# Altium PCB PA_v2_old.PcbDoc (part 2 of 2)
Units mm, origin at the board's own origin, x right, y up, seen from the top; angles counter-clockwise.
Board outline 179 x 79 mm, 2 copper layers (Top Layer, Bottom Layer), stack 1.571 mm thick; 152 components, 92 nets, 512 pads, 151 vias.
Unrouted connection lines stored in the file: 225.
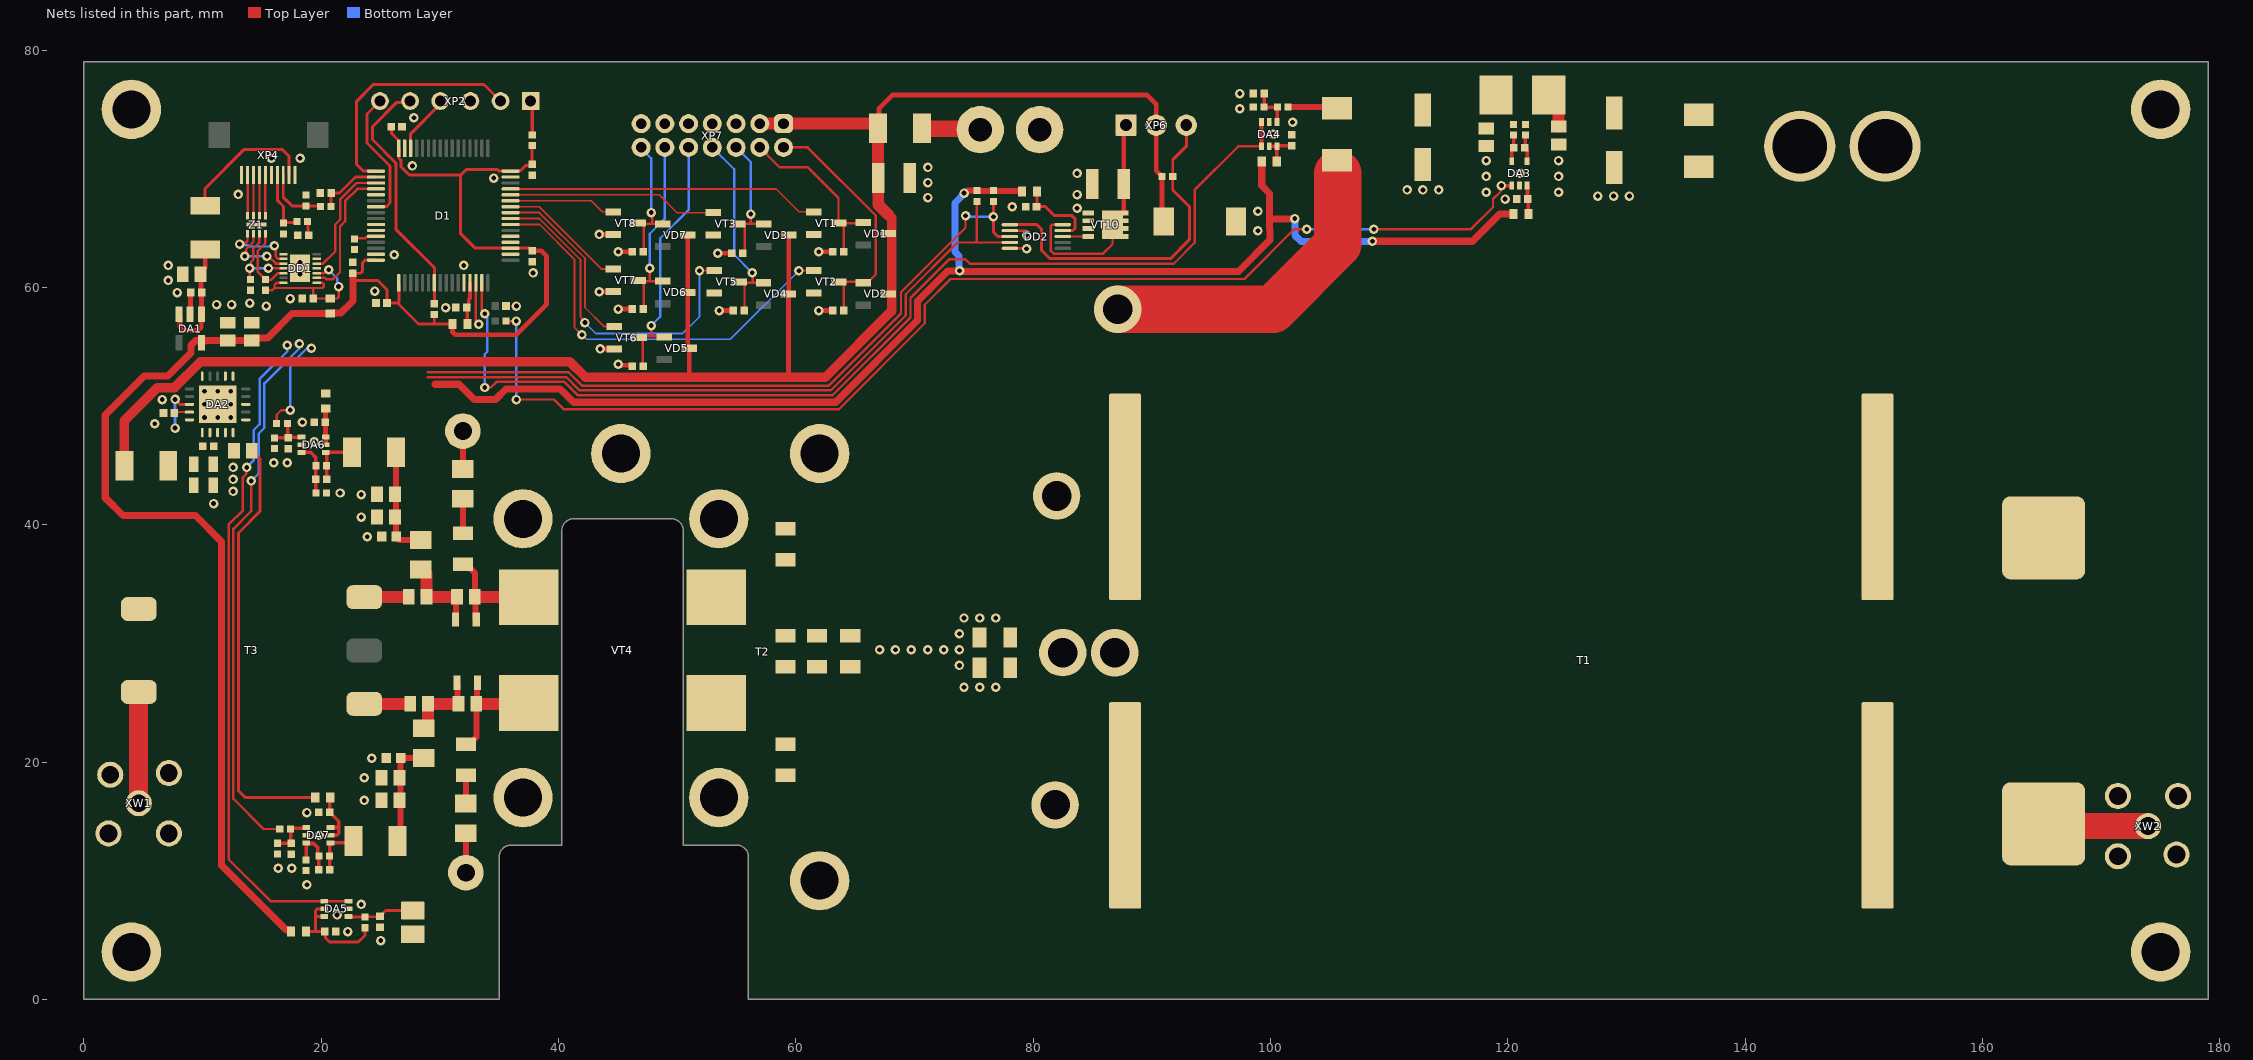
[diagram p2: the nets of this part, all layers, seen from the top]

## Via types
v1: diameter 0.8, hole 0.4, Top Layer to Bottom Layer, tented both sides, 138 vias
v2: diameter 0.8, hole 0.4, Top Layer to Bottom Layer, 11 vias
v3: diameter 4, hole 2.5, Top Layer to Bottom Layer, 2 vias

## Nets (pads, with @x,y where several pads share a name; then routed paths per layer and width w, separated by ;. In a path a pad name is that pad's centre, name@x,y a point inside that pad or via, vN(x,y) a via of type N, cw(c..) or ccw(c..) an arc to the next point about the centre after c; other vN are vias at no path point) (continued)
ADC_TEMP: D1.14 DA5.3 DA5.4 | length 60.5
  Top Layer w0.2: v1(13.716,44.831) 13.688,44.803 13.688,44.269 13.397,43.978 13.397,41.21 12.194,40.007 12.194,11.814 15.73,8.278 DA5.4@20.243,8.278 DA5.3@22.293,8.278 ; D1.14@33.035,60.378 33.035,57.135 v1(33.274,56.896)
  Bottom Layer w0.2: v1(13.716,44.831) 14.301,45.416 14.301,47.956 14.808,48.463 14.808,52.273 17.145,54.61 v1(17.145,55.118)
ADC_VOLT: D1.15 DA4.3 DA4.4 | length 89.8
  Top Layer w0.2: D1.15@33.535,60.378 33.535,58.032 v1(33.782,57.785) ; v1(33.782,51.562) 34.29,51.562 34.76,52.032 40.493,52.032 41.604,50.921 63.108,50.921 69.658,57.472 69.658,59.117 72.898,62.357 74.295,62.357 74.656,61.996 91.841,61.996 93.599,63.754 93.599,68.199 97.281,71.881 DA4.4@99.231,71.881
  Top Layer w0.3: DA4.4@99.231,71.881 DA4.3@99.231,73.931
  Bottom Layer w0.2: v1(33.782,51.562) 33.782,54.359 33.974,54.551 33.974,57.431 33.782,57.623 v1(33.782,57.785)
BAND0_EN: D1.27 VT8.1 | length 9
  Top Layer w0.15: D1.27@35.955,67.298 42.751,67.298 43.686,66.363 VT8.1@44.602,66.363
BAND1_EN: D1.26 VT7.1 | length 10.8
  Top Layer w0.15: D1.26@35.955,66.798 38.386,66.798 43.647,61.537 VT7.1@44.602,61.537
BAND2_EN: D1.25 VT6.1 | length 15.2
  Top Layer w0.15: D1.25@35.955,66.302 38.387,66.302 42.223,62.466 42.223,58.301 43.813,56.711 VT6.1@44.695,56.711
BAND3_EN: D1.24 VT5.1 | length 28.5
  Top Layer w0.15: D1.24@35.955,65.798 38.396,65.798 41.842,62.352 41.842,57.534 42.223,57.153 v1(42.223,57.031) ; v1(51.875,61.41) VT5.1@53.111,61.41
  Bottom Layer w0.15: v1(42.223,57.031) 43.152,56.102 50.438,56.102 51.875,57.539 v1(51.875,61.41)
BAND4_EN: D1.28 VT3.1 | length 17.7
  Top Layer w0.15: D1.28@35.955,67.798 48.474,67.798 49.975,66.297 VT3.1@53.018,66.297
BAND5_EN: D1.29 VT1.1 | length 26.3
  Top Layer w0.15: D1.29@35.955,68.298 58.322,68.298 60.257,66.363 VT1.1@61.493,66.363
BAND6_EN: D1.23 VT2.1 | length 35.3
  Top Layer w0.15: D1.23@35.955,65.298 38.401,65.298 41.334,62.365 41.334,56.65 v1(41.969,56.015) ; v1(60.257,61.41) VT2.1@61.493,61.41
  Bottom Layer w0.15: v1(41.969,56.015) 42.35,55.634 54.481,55.634 v1(60.257,61.41)
CON_RS422A: XP4.9 Z1.4 | length 3.4
  Top Layer w0.2: Z1.4@13.787,66.051 13.793,66.057 13.793,69.471 XP4.9@13.799,69.477
CON_RS422B: XP4.8 Z1.3 | length 3.4
  Top Layer w0.2: Z1.3@14.287,66.051 14.293,66.057 14.293,69.471 XP4.8@14.299,69.477
CON_RS422Y: XP4.6 Z1.1 | length 3.4
  Top Layer w0.2: Z1.1@15.287,66.051 15.293,66.057 15.293,69.471 XP4.6@15.299,69.477
CON_RS422Z: XP4.7 Z1.2 | length 3.4
  Top Layer w0.2: Z1.2@14.787,66.051 14.793,66.057 14.793,69.471 XP4.7@14.799,69.477
CON_TX_FAIL: R4.1 R5.1 XP4.3 | length 5.3
  Top Layer w0.25: XP4.3@16.799,69.477 16.799,67.596 17.527,66.868 R5.1@18.728,66.868 18.757,66.839 19.9,66.839 R4.1@19.929,66.81
CON_TXON: R10.1 R11.1 XP4.4 | length 5.5
  Top Layer w0.25: XP4.4@16.299,69.477 16.299,67.334 16.823,66.81 R11.1@16.823,65.413 16.887,65.476 17.892,65.476 R10.1@17.955,65.54
DAC_BIAS1: D1.20 R24.1 | length 8.2
  Top Layer w0.2: R24.1@16.246,48.522 16.246,49.266 16.637,49.657 v1(17.399,49.657)
  Bottom Layer w0.2: v1(17.399,49.657) 17.399,53.467 18.796,54.864 v1(19.177,54.864)
DAC_BIAS2: D1.21 R32.1 | length 45.6
  Top Layer w0.2: v1(14.097,43.688) 14.097,41.148 12.594,39.645 12.594,16.904 15.139,14.359 R32.1@16.5,14.359
  Bottom Layer w0.2: v1(14.097,43.688) 14.732,44.323 14.732,47.688 15.208,48.164 15.208,51.911 18.161,54.864 v1(18.161,55.245)
GND: C1.1 C2.1 C3.1 C4.1 C5.1 C6.1 C7.1 C8.1 C9.1 C10.1 C11.1 C12.1 C13.1 C14.1 C15.1 C16.1 C17.1 C18.1 C19.1 C21.2 C22.2 C23.1 C24.1 C26.1 C28.1 C30.1 C32.1 C33.1 C35.1 C37.1 C38.1 C39.1 C40.1 C41.1 C42.1 C43.1 C46.2 C47.2 C48.2 C49.2 C50.1 C54.1 C55.1 C56.1 C141.1 C142.1 C143.1 C144.1 C145.1 C155.1 C156.1 C165.1 C166.1 D1.12 D1.18 D1.31 D1.47 D1.63 DA1.2 DA2.6 DA2.7 DA2.10 DA2.17 DA2.18 DA2.19 DA2.21 DA3.2 DA4.2 DA5.2 DA6.2 DA7.2 DD1.4 DD1.6 DD1.8 DD1.15 DD2.2 DD2.5 F1.2 pad.1 R5.2 R11.2 R12.1 R14.2 R25.2 R28.1 R30.1 R33.2 R34.1 T1.2@151.139,42.345 T1.5 T3.5 VT1.2 VT2.2 VT3.2 VT5.2 VT6.2 VT7.2 VT8.2 VT10.S XP1.2 XP2.3 XP4.1 XP4.5 XP4.10 XP5.2 XP7.5 XP7.7 XP7.9 XP7.11 XP7.13 XW1.2 XW2.2 Z1.9 | length 16.4
  Top Layer w0.2: DD2.5@78.032,63.286 v1@79.275,63.286 ; DD2.2@78.032,64.786 79.299,64.786 v1@79.434,64.651
  Top Layer w0.4: DA1.2@8.949,57.723 8.973,57.747 8.973,59.547 C4.1@8.997,59.571 ; v1(43.427,59.637) VT7.2@44.602,59.637 ; v1(43.427,64.463) VT8.2@44.602,64.463 ; v1(43.52,54.811) VT6.2@44.695,54.811 ; v1(45.033,53.522) 45.11,53.446 46.11,53.446 C54.1@46.208,53.348 ; v1(45.033,58.174) C55.1@46.208,58.174 ; v1(45.033,63) C56.1@46.208,63 ; v1(53.415,62.873) C33.1@54.59,62.873 ; v1(53.542,58.047) C50.1@54.717,58.047 ; v1(61.924,58.047) C32.1@63.099,58.047 ; v1(61.924,63) C5.1@63.099,63
  other v1: 25.019,4.953 22.225,5.715 21.336,7.112 23.368,8.001 18.796,9.652 16.383,11.049 17.526,11.049 19.812,13.843 18.796,15.748 23.622,16.764 23.622,18.669 24.257,20.32 74.164,26.297 75.497,26.297 76.831,26.297 73.783,28.138 67.052,29.472 68.385,29.472 69.719,29.472 71.116,29.472 72.449,29.472 73.783,29.472 73.783,30.805 74.164,32.139 75.497,32.139 76.831,32.139 23.876,38.989 23.368,40.64 10.922,41.783 23.368,42.545 21.59,42.672 12.573,42.799 12.573,43.815 12.573,44.831 16.002,45.212 17.145,45.212 19.431,46.99 5.969,48.514 18.415,48.641 6.604,50.546 30.48,58.293 15.367,58.42 36.449,58.42 11.176,58.547 12.446,58.547 13.97,58.674 17.399,59.055 7.874,59.563 24.511,59.69 7.112,60.579 37.846,61.214 7.112,61.849 32.004,61.849 26.162,62.738 79.434,63.254 79.434,64.397 98.933,64.77 98.933,66.421 83.693,66.675 78.232,66.802 119.761,67.437 71.12,67.564 127.567,67.699 128.901,67.699 130.234,67.699 13.013,67.826 83.693,67.818 118.169,68.016 124.265,68.016 111.502,68.207 112.835,68.207 114.169,68.207 71.12,68.834 34.544,69.215 118.169,69.35 124.265,69.35 83.693,69.596 121.031,69.596 71.12,70.104 27.686,70.231 118.169,70.683 124.265,70.683 15.807,70.874 18.22,70.874 100.203,72.898 101.854,73.914 27.813,74.295 97.409,75.057 97.409,76.327
  other v2: 10.173,49.043 11.273,49.043 12.373,49.043 10.173,50.143 11.273,50.143 12.373,50.143 10.173,51.243 11.273,51.243 12.373,51.243 18.22,61.095 18.22,62.111
I2C_SCL: D1.58 DD2.4 R6.1 | length 59.2
  Top Layer w0.2: 28.956,52.432 40.659,52.432 41.77,51.321 62.942,51.321 69.258,57.637 69.258,59.422 73.615,63.779 75.243,63.779 ; R6.1@75.243,67.249 75.243,63.779 ; DD2.4@78.025,63.779 75.243,63.779
I2C_SDA: D1.59 DD2.3 R7.1 | length 59.6
  Top Layer w0.2: 28.956,52.832 40.86,52.832 41.971,51.721 62.776,51.721 68.858,57.803 68.858,59.587 74.295,65.024 v1(74.295,66.04)
  Top Layer w0.25: R7.1@76.64,67.249 v1(76.64,65.95) 76.64,64.651 77.005,64.286 DD2.3@78.032,64.286
  Bottom Layer w0.2: v1@74.586,65.95 v1(76.64,65.95)
IN_5V: L1.1 XP4.2 | length 11.7
  Top Layer w0.25: L1.1@10.219,66.882 10.219,68.334 13.521,71.636 16.696,71.636 17.299,71.033 XP4.2@17.299,69.477
NetC1_2: C1.2 C4.2 DA1.1 DA1.3 L1.2 | length 9.7
  Top Layer w0.4: DA1.3@7.999,57.723 8.099,57.623 8.099,56.63 8.334,56.396 9.665,56.396 9.899,56.63 DA1.1@9.899,57.723 9.908,57.732 9.908,59.562 C4.2@9.917,59.571 9.872,59.616 9.872,61.049 C1.2@9.826,61.095 ; C1.2@9.826,61.245 10.219,61.638 L1.2@10.219,63.182
NetC9_2: C9.2 C10.2 C11.2 DA2.13 DA2.15 DA2.16 L35.2 | length 3.8
  Top Layer w0.25: v1(7.679,50.554) 8.09,50.143 DA2.13@8.898,50.143
  Bottom Layer w0.25: v1(7.679,48.141) v1(7.679,50.554)
NetC12_2: C12.2 DD1.1 DD1.3 DD1.14 L3.2 R9.2 | length 13.9
  Top Layer w0.2: R9.2@15.299,59.756 15.865,59.756 16.061,59.952 ; DD1.14@16.825,60.403 16.258,60.403 16.061,60.206 16.061,59.952 ; DD1.1@19.615,60.403 20.055,60.403 20.223,60.235 20.223,60.069 20.106,59.952 19.363,59.952 ; DD1.3@19.615,61.203 20.216,61.203 20.489,61.476 v1(20.633,61.476) ; v1(21.463,60.071) 21.463,59.175 21.346,59.058 L3.2@20.76,59.058 20.755,59.063 C12.2@19.315,59.063 19.315,59.904 19.363,59.952 ; 16.061,59.952 19.363,59.952
  Bottom Layer w0.2: v1(20.633,61.476) 21.348,60.761 21.348,60.186 v1(21.463,60.071)
NetC13_2: C13.2 D1.53 R10.2 | length 1.2
  Top Layer w0.25: R10.2@18.855,65.54 18.895,65.5 18.895,64.436 C13.2@18.934,64.397
NetC14_2: C14.2 D1.13 L4.1 | length 3.6
  Top Layer w0.3: L4.1@32.312,56.904 32.291,56.925 32.291,58.279 C14.2@32.269,58.301 32.439,58.471 32.439,58.982 32.535,59.078 D1.13@32.535,60.378
NetC21_1: C21.1 C23.2 L5.2 R15.1 R16.1 | length 1.9
  Top Layer w1: C23.2@124.265,73.541 R15.1@124.265,75.446
NetC22_1: C22.1 C24.2 L6.1 R15.2 R17.1 R27.2 | length 4.2
  Top Layer w0.5: R27.2@101.474,75.192 105.51,75.192 L6.1@105.596,75.106
NetC25_1: C25.1 DA3.5 R17.2 | length 2.3
  Top Layer w0.3: DA3.5@120.313,70.629 120.313,71.573 120.479,71.739 120.479,72.813 R17.2@120.455,72.837
NetC25_2: C25.2 DA3.4 R16.2 | length 2.3
  Top Layer w0.3: R16.2@121.471,72.837 121.447,72.813 121.447,71.787 C25.2@121.423,71.763 121.613,71.573 DA3.4@121.613,70.629
NetC27_1: C27.1 R19.1 | length 2.9
  Top Layer w0.5: C27.1@31.936,39.281 R19.1@31.936,42.192
NetC27_2: C27.2 C29.1 R20.2 VT4.3 | length 9.8
  Top Layer w0.5: C27.2@31.936,36.681 32.211,36.681 32.94,35.952 C29.1@32.94,33.917 33.015,33.842 33.015,32.062 R20.2@33.065,32.012
  Top Layer w1: C29.1@32.94,33.917 37.442,33.917 VT4.3@37.475,33.884
NetC28_2: C28.2 DA3.3 L7.2 | length 2.4
  Top Layer w0.3: DA3.3@121.613,68.579 121.645,68.547 121.645,67.477 C28.2@121.677,67.445 121.699,67.423 121.699,66.196 L7.2@121.72,66.175
NetC29_2: C29.2 C36.1 R20.1 R22.1 | length 7.1
  Top Layer w0.5: R20.1@31.315,32.012 31.365,32.062 31.365,33.842 C29.2@31.44,33.917
  Top Layer w1: R22.1@28.38,36.223 28.53,36.223 28.876,35.877 C36.1@28.876,33.917 C29.2@31.44,33.917
NetC30_2: C30.2 C31.2 C52.2 C53.2 T1.1 T2.1 VT4.1
NetC31_1: C31.1 C35.2 C52.1 C53.1 T1.3 T2.3 VT4.2
NetC34_1: C34.1 C45.2 R21.2 VT4.4 | length 10.2
  Top Layer w0.5: C45.2@32.19,21.501 32.465,21.501 33.067,22.103 C34.1@33.067,24.9 33.128,24.961 33.128,26.628 R21.2@33.178,26.678
  Top Layer w1: C34.1@33.067,24.9 37.391,24.9 VT4.4@37.475,24.984
NetC34_2: C34.2 C44.1 R21.1 R23.1 | length 6.7
  Top Layer w0.5: R21.1@31.428,26.678 31.478,26.628 31.478,24.989 C34.2@31.567,24.9
  Top Layer w1: R23.1@28.634,22.848 28.753,22.848 29.003,23.098 C44.1@29.003,24.9 C34.2@31.567,24.9
NetC36_2: C36.2 T3.1 | length 3.8
  Top Layer w1: T3.1@23.631,33.901 27.376,33.901 C36.2@27.376,33.917
NetC37_2: C37.2 C38.2 C43.2 L8.2 R22.2 | length 9.3
  Top Layer w0.5: L8.2@26.293,46.109 26.313,46.089 C43.2@26.313,38.997 ; C43.2@26.313,38.972 26.562,38.723 R22.2@28.38,38.723
NetC39_2: C39.2 C40.2 C142.2 L34.2 R23.2 | length 9
  Top Layer w0.5: L34.2@26.42,13.343 26.694,13.617 C142.2@26.694,20.328 28.614,20.328 R23.2@28.634,20.348
NetC41_2: C41.2 C42.2 L6.2 T2.2 | length 26.8
  Top Layer w4: v3(87.122,58.166) 100.203,58.166 105.664,63.627 105.664,69.596
  other v3: 86.868,29.21
NetC44_2: C44.2 T3.3 | length 3.9
  Top Layer w1: T3.3@23.631,24.901 C44.2@27.503,24.9
NetC45_1: C45.1 R26.1 | length 2.4
  Top Layer w0.5: R26.1@32.19,16.498 C45.1@32.19,18.901
NetC46_1: C46.1 DA4.5 DA4.6 L9.2 | length 3.2
  Top Layer w0.3: DA4.5@99.881,71.881 DA4.6@100.531,71.881 ; L9.2@100.511,70.62 100.521,70.63 100.521,71.871 DA4.6@100.531,71.881 ; C46.1@101.786,71.938 100.581,71.938 100.531,71.888 DA4.6@100.531,71.881
NetC47_1: C47.1 DA4.1 R27.1 R28.2 | length 3.6
  Top Layer w0.3: C47.1@99.452,76.335 99.447,76.33 99.447,75.197 R28.2@99.442,75.192 R27.1@100.574,75.192 100.553,75.17 100.553,73.952 DA4.1@100.531,73.931
NetC48_1: C48.1 DA5.5 DA5.6 L10.2 R29.1 | length 9.8
  Top Layer w0.25: L10.2@18.723,5.723 19.512,5.723 ; DA5.6@20.243,6.978 19.519,6.978 19.512,6.985 ; DA5.5@20.243,7.628 19.658,7.628 19.512,7.481 19.512,6.985 ; R29.1@23.681,6.035 23.681,5.393 23.114,4.826 20.701,4.826 20.353,5.174 20.353,5.67 C48.1@20.3,5.723 19.512,5.723 ; 19.512,5.723 19.512,6.985
NetC49_1: C49.1 DA5.1 F1.1 R29.2 | length 5.7
  Top Layer w0.25: DA5.1@22.293,6.978 22.315,6.956 23.66,6.956 R29.2@23.681,6.935 23.71,6.964 24.922,6.964 C49.1@24.951,6.993 25.443,7.485 F1.1@27.714,7.485
NetC141_2: C141.2 DA6.5 DA6.6 L32.2 | length 3.1
  Top Layer w0.4: L32.2@20.379,49.797 20.355,49.773 20.355,48.673 C141.2@20.331,48.649 20.36,48.62 20.36,47.394 DA6.6@20.388,47.394 DA6.5@20.388,46.744
NetC143_2: C143.2 DA6.1 R24.2 R25.1 | length 3.5
  Top Layer w0.3: R25.1@16.061,47.321 16.066,47.326 17.199,47.326 C143.2@17.204,47.331 ; R24.2@17.146,48.522 17.175,48.493 17.175,47.36 C143.2@17.204,47.331 ; DA6.1@18.338,47.394 18.307,47.362 17.236,47.362 C143.2@17.204,47.331
NetC144_2: C144.2 DA7.5 DA7.6 L33.2 | length 4.8
  Top Layer w0.3: L33.2@20.755,17.026 20.734,17.004 20.734,15.777 C144.2@20.712,15.756 21.463,15.005 21.463,14.508 ; DA7.5@20.778,13.836 21.287,13.836 21.463,14.012 21.463,14.508 ; DA7.6@20.778,14.486 21.441,14.486 21.463,14.508
NetC145_2: C145.2 DA7.1 R32.2 R33.1 | length 3.7
  Top Layer w0.3: R33.1@16.315,13.158 16.32,13.163 17.453,13.163 C145.2@17.458,13.168 17.429,13.197 17.429,14.33 R32.2@17.4,14.359 17.477,14.436 18.678,14.436 DA7.1@18.728,14.486
NetC146_1: C146.1 DA6.4 L8.1 R31.2 | length 4.5
  Top Layer w0.3: C146.1@20.458,43.823 20.453,43.828 20.453,44.961 R31.2@20.448,44.966 20.448,46.044 20.398,46.094 DA6.4@20.388,46.094 22.578,46.094 L8.1@22.593,46.109
NetC146_2: C146.2 DA6.3 R30.2 R31.1 | length 4.4
  Top Layer w0.3: DA6.3@18.338,46.094 19.124,46.094 19.548,45.67 R31.1@19.548,44.966 19.543,44.961 19.543,43.828 C146.2@19.538,43.823 19.543,43.818 19.543,42.685 R30.2@19.548,42.68
NetC147_1: C147.1 DA7.4 L34.1 R35.2 | length 4.3
  Top Layer w0.3: C147.1@20.712,10.93 20.707,10.935 20.707,12.068 R35.2@20.702,12.073 20.702,13.136 20.752,13.186 DA7.4@20.778,13.186 22.563,13.186 L34.1@22.72,13.343
NetC147_2: C147.2 DA7.3 R34.2 R35.1 | length 4.5
  Top Layer w0.3: R34.2@18.728,11.761 DA7.3@18.728,13.186 18.778,13.136 19.376,13.136 19.689,12.823 19.689,12.186 R35.1@19.802,12.073 19.797,12.068 19.797,10.935 C147.2@19.792,10.93
NetC156_2: C156.2 DA2.14 | length 1.3
  Top Layer w0.2: C156.2@7.631,49.411 7.713,49.493 DA2.14@8.898,49.493
NetC165_2: C165.2 DD2.9 L36.2 | length 6.9
  Top Layer w0.25: L36.2@80.318,68.08 80.297,68.058 80.297,66.831 C165.2@80.275,66.81 81.018,66.81 81.788,66.04 83.252,66.04 83.507,65.785 83.507,64.947 83.352,64.792 82.488,64.792 DD2.9@82.482,64.786
NetC166_2: C166.2 DD2.10 VT10.D XP6.1 | length 18
  Top Layer w0.2: DD2.10@82.482,65.286 81.593,65.286 81.466,65.159 81.466,63.12 81.74,62.846 85.884,62.846 86.673,63.635 VT10.D@86.673,65.286
  Top Layer w0.4: VT10.D@87.533,66.276 87.617,66.276 C166.2@87.617,68.715 87.617,73.469 XP6.1@87.816,73.668
NetD1_7: D1.7 R13.1 XP2.5 | length 21.2
  Top Layer w0.25: XP2.5@27.491,75.7 27.386,75.595 26.366,75.595 24.314,73.542 24.314,72.46 26.289,70.485 26.289,64.897 29.535,61.651 D1.7@29.535,60.378 29.529,60.372 29.529,58.63 R13.1@29.523,58.624
NetD1_60: D1.60 R14.1 | length 1.9
  Top Layer w0.2: R14.1@22.792,64.085 22.836,64.129 23.678,64.129 23.807,64.258 24.575,64.258 D1.60@24.615,64.298
NetDA3_1: DA3.1 R18.2 | length 101.1
  Top Layer w0.2: R18.2@35.561,57.158 v1(36.441,57.158) ; v1(36.449,50.546) 39.624,50.546 40.449,49.721 63.605,49.721 70.858,56.975 70.858,58.539 73.025,60.706 97.79,60.706 101.989,64.905 v1(103.056,64.905) ; v1@108.712,64.905 116.899,64.905 118.745,66.751 118.745,67.437 119.373,68.065 119.373,68.503 v1(119.448,68.579)
  Top Layer w0.3: v1(119.448,68.579) DA3.1@120.313,68.579
  Bottom Layer w0.2: v1(36.441,57.158) 36.445,57.154 36.445,50.55 v1(36.449,50.546) ; v1(103.056,64.905) v1@108.712,64.905
  other v1: 108.712,64.897
NetDD2_1: DD2.1 R36.1 XP6.3 | length 28.7
  Top Layer w0.25: DD2.1@78.032,65.286 80.323,65.286 80.704,64.905 80.704,63.127 81.41,62.421 91.555,62.421 93.15,64.016 93.15,66.81 91.753,68.207 R36.1@91.753,69.35 91.753,70.747 92.896,71.89 XP6.3@92.896,73.668
NetDD2_8: DD2.8 VT10.G | length 2.2
  Top Layer w0.2: DD2.8@82.482,64.286 82.487,64.291 84.628,64.291 VT10.G@84.633,64.296
NetL2_1: L2.1 XP5.1 | length 5
  Top Layer w1: L2.1@70.616,73.414 L2.1@70.68,73.35 ; XP5.1@75.474,73.35 XP5.1@75.537,73.287
  Top Layer w1.4: L2.1@70.68,73.35 XP5.1@75.474,73.35
NetR8_2: R8.2 XP2.1 | length 2.9
  Top Layer w0.3: XP2.1@37.651,75.7 37.778,75.573 R8.2@37.778,72.848
NetR19_2: R19.2 T2.4 | length 3.2
  Top Layer w0.5: R19.2@31.936,44.692 T2.4@31.936,47.887
NetR26_2: R26.2 T2.5 | length 3.3
  Top Layer w0.5: T2.5@32.19,10.676 R26.2@32.19,13.998
NetT1_4: T1.2@151.139,16.345 T1.4 XW2.1 | length 8.9
  Top Layer w2.2: T1.4@165.139,14.795 165.334,14.6 XW2.1@173.935,14.6
NetT3_4: T3.4 XW1.1 | length 9.4
  Top Layer w1.6: XW1.1@4.618,16.531 T3.4@4.618,25.901
  Top Layer w2: T3.4@4.618,25.901 T3.4@4.631,25.901
RELAY_0: C56.2 VD7.1 VT8.3 XP7.14 | length 10.9
  Top Layer w0.2: VT8.3@46.989,65.347 47.891,65.347 ; C56.2@47.189,62.934 VT8.3@47.189,65.147 ; v1(47.811,66.302) 47.891,66.222 47.891,65.347 ; VD7.1@48.793,65.347 47.891,65.347
  Bottom Layer w0.2: XP7.14@46.955,71.795 46.955,71.722 47.811,70.866 v1(47.811,66.302)
RELAY_1: C55.2 VD6.1 VT7.3 XP7.12 | length 15.8
  Top Layer w0.2: VT7.3@46.989,60.521 47.684,60.521 ; C55.2@47.189,58.108 VT7.3@47.189,60.321 ; v1(47.684,61.603) 47.684,60.521 ; VD6.1@48.793,60.521 47.684,60.521
  Bottom Layer w0.2: v1(47.684,61.603) 47.684,64.524 48.955,65.795 XP7.12@48.955,71.795
RELAY_2: C54.2 VD5.1 VT6.3 XP7.10 | length 21.2
  Top Layer w0.2: VT6.3@46.896,55.888 47.798,55.888 ; C54.2@47.096,53.475 VT6.3@47.096,55.688 ; v1(47.811,56.777) 47.798,56.764 47.798,55.888 ; VD5.1@48.7,55.888 47.798,55.888
  Bottom Layer w0.2: v1(47.811,56.777) 48.573,57.539 48.573,64.143 50.955,66.525 XP7.10@50.955,71.795
RELAY_3: C50.2 VD4.1 VT5.3 XP7.8 | length 16.8
  Top Layer w0.2: VT5.3@55.464,60.394 56.366,60.394 ; C50.2@55.664,57.981 VT5.3@55.664,60.194 ; v1(56.32,61.222) 56.366,61.176 56.366,60.394 ; VD4.1@57.268,60.394 56.366,60.394
  Bottom Layer w0.2: XP7.8@52.955,71.795 54.796,69.954 54.796,62.746 v1(56.32,61.222)
RELAY_4: C33.2 VD3.1 VT3.3 XP7.6 | length 11
  Top Layer w0.2: VT3.3@55.498,65.347 56.193,65.347 ; C33.2@55.698,62.934 VT3.3@55.698,65.147 ; v1(56.193,66.175) 56.193,65.347 ; VD3.1@57.302,65.347 56.193,65.347
  Bottom Layer w0.2: XP7.6@54.955,71.795 56.193,70.557 v1(56.193,66.175)
RELAY_5: C5.2 VD1.1 VT1.3 XP7.4 | length 14.9
  Top Layer w0.2: XP7.4@56.955,71.795 58.638,70.112 61.019,70.112 63.593,67.538 VT1.3@63.593,65.413 ; C5.2@64.019,63 64.019,65.213 63.819,65.413 65.623,65.413 VD1.1@65.684,65.474
RELAY_6: C32.2 VD2.1 VT2.3 XP7.2 | length 21.1
  Top Layer w0.2: XP7.2@58.955,71.795 60.987,71.795 66.734,66.048 66.734,61.094 66.034,60.394 VD2.1@65.684,60.394 65.618,60.46 VT2.3@63.819,60.46 ; VT2.3@63.593,60.46 VT2.3@63.819,60.46 ; C32.2@64.019,58.047 64.019,60.26 VT2.3@63.819,60.46
RS422_RX: D1.52 DD1.2 | length 11.4
  Top Layer w0.2: DD1.2@19.615,60.803 20.316,60.803 20.424,60.695 20.995,60.695 21.576,61.276 21.576,65.137 22.014,65.575 22.014,67.267 23.045,68.298 D1.52@24.615,68.298
RS422_TX: D1.51 DD1.5 | length 10.1
  Top Layer w0.2: DD1.5@19.615,62.003 20.144,62.003 21.176,63.035 21.176,65.303 21.614,65.741 21.614,67.433 22.979,68.798 D1.51@24.615,68.798
RS422A: DD1.12 R9.1 Z1.8 | length 6.1
  Top Layer w0.2: Z1.8@15.287,64.521 15.287,63.704 14.664,63.081 14.664,61.291 R9.1@15.299,60.656 15.804,60.656 16.351,61.203 DD1.12@16.825,61.203
RS422B: DD1.11 R12.2 Z1.7 | length 7.5
  Top Layer w0.2: R12.2@14.029,60.656 13.964,60.721 13.964,61.326 14.082,61.443 v1@14.124,61.443 ; v1@14.264,61.603 14.241,61.603 14.124,61.485 v1@14.124,61.443 ; Z1.7@14.787,64.521 14.787,63.778 14.264,63.255 14.264,62.329 14.079,62.144 14.079,61.718 v1(13.964,61.603) v1@14.124,61.443 ; v1(15.553,61.603) DD1.11@16.825,61.603
  Bottom Layer w0.2: v1(13.964,61.603) v1(15.553,61.603)
RS422Y: DD1.9 Z1.5 | length 6.2
  Top Layer w0.2: v1(13.117,63.652) v1@13.394,63.652 ; v1@13.393,63.515 13.394,63.516 13.394,63.727 13.417,63.75 13.628,63.75 13.787,63.909 Z1.5@13.787,64.521 ; v1@15.934,63.381 16.025,63.381 16.175,63.231 16.175,62.579 16.351,62.403 DD1.9@16.825,62.403
  Bottom Layer w0.2: v1(13.117,63.652) 13.225,63.544 13.817,63.544 13.917,63.444 15.871,63.444 v1@15.934,63.381
  other v1: 16.061,63.508
RS422Z: DD1.10 Z1.6 | length 5.7
  Top Layer w0.2: v1(13.564,62.619) 13.679,62.734 13.679,63.235 14.287,63.844 Z1.6@14.287,64.521 ; v1(15.426,62.619) 15.559,62.619 16.175,62.003 DD1.10@16.825,62.003
  Bottom Layer w0.2: v1(13.564,62.619) v1(15.426,62.619)
SWCLK: D1.49 XP2.2 | length 20.5
  Top Layer w0.25: D1.49@24.615,69.798 23.541,69.798 22.987,70.352 22.987,75.692 24.384,77.089 33.722,77.089 XP2.2@35.111,75.7
SWDIO: D1.46 XP2.4 | length 5
  Top Layer w0.25: D1.46@27.535,71.718 27.535,72.95 30.031,75.446 XP2.4@30.031,75.7
SWO: D1.55 XP2.6 | length 11.2
  Top Layer w0.25: D1.55@24.615,66.798 25.493,66.798 25.799,67.103 25.799,70.235 23.864,72.17 23.864,74.612 XP2.6@24.951,75.7
TX_FAIL: C8.2 D1.50 R4.2 | length 5.5
  Top Layer w0.25: R4.2@20.829,66.81 20.834,66.815 20.834,67.948 C8.2@20.839,67.953 21.533,67.953 22.878,69.298 D1.50@24.615,69.298
VDD_3V3: C2.2 C3.2 C15.2 C16.2 C17.2 C18.2 C19.2 D1.1 D1.19 D1.32 D1.48 D1.64 DA1.5 L3.1 L4.2 L7.1 L9.1 L10.1 L36.1 R6.2 R7.2 R8.1 R13.2 | length 261.7
  Top Layer w0.25: 22.665,60.579 24.765,60.579 25.538,59.806 C19.2@25.538,58.682 26.408,58.682 26.46,58.63 ; C17.2@22.665,61.191 23.319,61.191 23.495,61.367 23.495,62.103 23.68,62.288 D1.64@24.605,62.288 ; C16.2@25.888,73.541 25.912,73.517 25.912,72.992 26.52,72.384 26.52,71.733 D1.48@26.535,71.718 26.55,71.703 26.55,70.86 26.739,70.671 26.739,70.153 27.423,69.469 31.75,69.469 ; D1.1@26.535,60.378 26.535,58.706 26.46,58.63 ; R13.2@29.523,57.724 29.523,57 29.619,56.904 ; L4.2@31.052,56.904 29.619,56.904 ; D1.32@35.951,69.794 34.991,69.794 34.844,69.94 32.221,69.94 31.75,69.469 ; D1.32@35.955,69.798 35.97,69.813 36.765,69.813 37.23,70.277 37.69,70.277 C15.2@37.778,70.366 R8.1@37.778,71.948 ; C18.2@37.778,63.079 37.559,63.298 D1.19@35.955,63.298 32.968,63.298 31.75,64.516 31.75,69.469 ; 26.46,58.63 28.186,56.904 29.619,56.904
  Top Layer w0.3: R6.2@75.243,68.149 R6.2@75.278,68.114 ; L36.1@79.024,68.114 L36.1@79.058,68.08
  Top Layer w0.4: L4.2@31.052,56.904 31.052,56.241 31.287,56.007 36.422,56.007 38.989,58.574 38.989,62.611 38.521,63.079 C18.2@37.778,63.079
  Top Layer w0.5: v1(74.168,67.945) 74.249,67.945 74.452,68.148 R6.2@75.243,68.149 ; R6.2@75.278,68.114 L36.1@79.024,68.114
  Top Layer w0.6: L10.1@17.463,5.723 17.463,5.798 17.418,5.843 17.049,5.843 11.594,11.298 11.594,38.571 9.398,40.767 3.302,40.767 1.798,42.271 1.798,49.252 5.084,52.538 7.072,52.538 9.017,54.483 9.017,55.118 9.398,55.499 10.267,55.499 10.287,55.519 C2.2@12.124,55.519 C3.2@14.156,55.519 14.356,55.719 15.46,55.719 17.539,57.798 L3.1@20.76,57.798 20.805,57.843 21.648,57.843 22.665,58.86 22.665,60.579 C17.2@22.665,61.191 ; 29.591,51.832 31.607,51.832 32.904,50.535 34.66,50.535 35.557,51.432 40.135,51.432 41.246,50.321 63.356,50.321 70.258,57.223 70.258,58.828 72.798,61.368 73.749,61.368 v1(73.787,61.406) ; v1@73.787,61.341 97.282,61.341 99.949,64.008 99.949,64.867 99.919,64.897 99.919,67.915 99.251,68.583 L9.1@99.251,70.62 ; 99.949,65.756 102.002,65.756 v1(102.04,65.794) ; v1@108.585,63.889 117.026,63.889 119.312,66.175 L7.1@120.46,66.175
  Bottom Layer w0.6: v1(73.787,61.406) 73.749,61.444 73.749,62.652 73.395,63.006 73.395,67.118 74.168,67.891 v1(74.168,67.945) ; v1(102.04,65.794) 102.04,64.397 102.556,63.881 v1(108.585,63.881) v1@108.594,63.881
VDD_5V0: C155.2 DA2.1 DA2.3 DA2.20 L32.1 L33.1 | length 36.5
  Top Layer w0.25: C155.2@14.144,46.236 14.144,46.086 14.519,45.711 14.669,45.711 14.859,45.521 14.859,41.148 13.019,39.308 13.019,17.588 13.581,17.026 L33.1@19.495,17.026
VDD_12V: C6.2 C7.2 L2.2 L35.1 R36.2 VD1.3 VD2.3 VD3.3 VD4.3 VD5.3 VD6.3 VD7.3 XP6.2 XP7.1 XP7.3 | length 159.6
  Top Layer w0.4: VD7.3@50.893,64.397 VD6.3@50.893,59.571 50.893,54.999 VD5.3@51.02,54.872 51.02,52.455 51.054,52.421 ; 59.182,52.421 59.368,52.607 VD4.3@59.368,59.444 59.402,59.478 VD3.3@59.402,64.397 ; L2.2@66.925,73.405 67.008,73.488 67.008,75.084 68.131,76.208 89.594,76.208 90.356,75.446 XP6.2@90.356,73.668 90.356,69.847 R36.2@90.853,69.35 90.853,65.678 C6.2@90.991,65.54
  Top Layer w0.8: L35.1@3.416,44.966 3.416,48.772 6.198,51.554 7.643,51.554 9.81,53.721 40.961,53.721 42.261,52.421 51.054,52.421 59.182,52.421 62.486,52.421 68.067,58.001 68.067,65.847 67.784,66.129
  Top Layer w1: XP7.3@56.955,73.795 XP7.1@58.955,73.795 66.666,73.795 66.916,73.545 L2.2@66.916,73.414 ; L2.2@66.925,73.405 66.925,69.231 C7.2@66.933,69.223 66.933,66.98 67.784,66.129
VDD_28V: L5.1 XP1.1 | length 0.8
  Top Layer w4: XP1.1@143.917,71.763 144.585,71.763 XP1.1@144.585,71.89
pads on no net: D1.2 D1.3 D1.4 D1.5 D1.6 D1.8 D1.9 D1.10 D1.11 D1.17 D1.22 D1.30 D1.33 D1.34 D1.35 D1.36 D1.37 D1.38 D1.39 D1.40 D1.41 D1.42 D1.43 D1.44 D1.45 D1.54 D1.56 D1.57 D1.61 D1.62 DA1.4 DA2.2 DA2.4 DA2.5 DA2.8 DA2.9 DA2.11 DA2.12 DD1.7 DD1.13 DD2.6 DD2.7 T3.2 VD1.2 VD2.2 VD3.2 VD4.2 VD5.2 VD6.2 VD7.2 XP4.0

## Polygon pours and split planes (outlines as drawn)
NetC31_1 on Top Layer "NETC31_1_L01_P006" (solid, pour order 6): 51.812,27.757 70.989,27.757 73.656,25.09 87.118,25.09 87.118,7.818 76.196,7.818 62.099,21.915 51.812,21.915
NetC30_2 on Top Layer "NETC30_2_L01_P005" (solid, pour order 5): 51.875,30.996 71.052,30.996 73.719,33.663 87.181,33.663 87.181,50.935 76.259,50.935 62.162,36.838 51.875,36.838
VDD_5V0 on Top Layer "VDD_5V0_L01_P004" (solid, pour order 4): 13.521,50.427 14.664,51.57 20.76,51.57 20.76,50.554 16.823,50.554 15.426,49.157 14.664,48.395 14.664,45.601 13.648,45.601 13.648,46.998 13.267,47.379 12.505,47.379 12.378,47.506 12.378,48.268 13.267,49.157 13.267,50.173
NetC9_2 on Top Layer "NETC9_2_L01_P003" (solid, pour order 3): 9.203,49.03 7.933,49.03 6.917,48.014 6.917,43.442 7.552,42.807 9.457,42.807 9.457,45.474 10.092,46.109 10.092,48.141
NetC22_1 on Top Layer "NETC22_1_L01_P002" (solid, pour order 2): 120.709,78.113 105.215,78.113 104.199,77.097 104.199,73.668 116.899,73.668 120.386,73.668 120.709,73.991
VDD_28V on Top Layer "VDD_28V_L01_P001" (solid, pour order 1): 139.632,71.128 142.68,74.176 146.871,69.985 144.077,67.191 135.822,67.191 134.679,68.334 134.679,71.128
NetC21_1 on Top Layer "NetC21_1" (solid, pour order 0): 137.346,73.668 137.346,76.97 136.203,78.113 121.217,78.113 121.217,73.668 134.806,73.668

## Other copper
Top Layer:
  rectangle net NetC41_2: 77.851,26.924 89.154,31.496

## Silkscreen, mask and mechanical layers (free items; w line width, h text height)
Bottom Solder:
  rectangle: 34.417,0 71.628,48.895
Board:
  lines w0.2: -0.018,0 0,79 179,79 179,0 56,0 56,12 ccw(c55,12) 55,13 50.5,13 50.5,39.541 ; 0,0 35,0 35,12 cw(c36,12) 36,13 40.25,13 40.25,39.5 ; 40.275,39.5 cw(c41.275,39.5) 41.275,40.5 49.53,40.5 ; 49.5,40.5 cw(c49.5,39.5) 50.5,39.5 ; 49.53,40.513 49.558,40.484 ; 95,10 ccw(c96,10) 96,9 145,9 ccw(c145,10) 146,10 146,49 ccw(c145,49) 145,50 96,50 ccw(c96,49) 95,49 95,10